# Altium PCB AT long bus (13.3 x 4.2 inches).PCBDOC
Units mil, origin at the board's own origin, x right, y up, seen from the top; angles counter-clockwise.
Board outline 13300 x 4200 mil, 10 copper layers (TopLayer, MidLayer1, MidLayer2, MidLayer3, MidLayer4, MidLayer5, MidLayer6, MidLayer7, MidLayer8, BottomLayer); 22 components, 51 nets, 177 pads, 0 vias.
Unrouted connection lines stored in the file: 85.
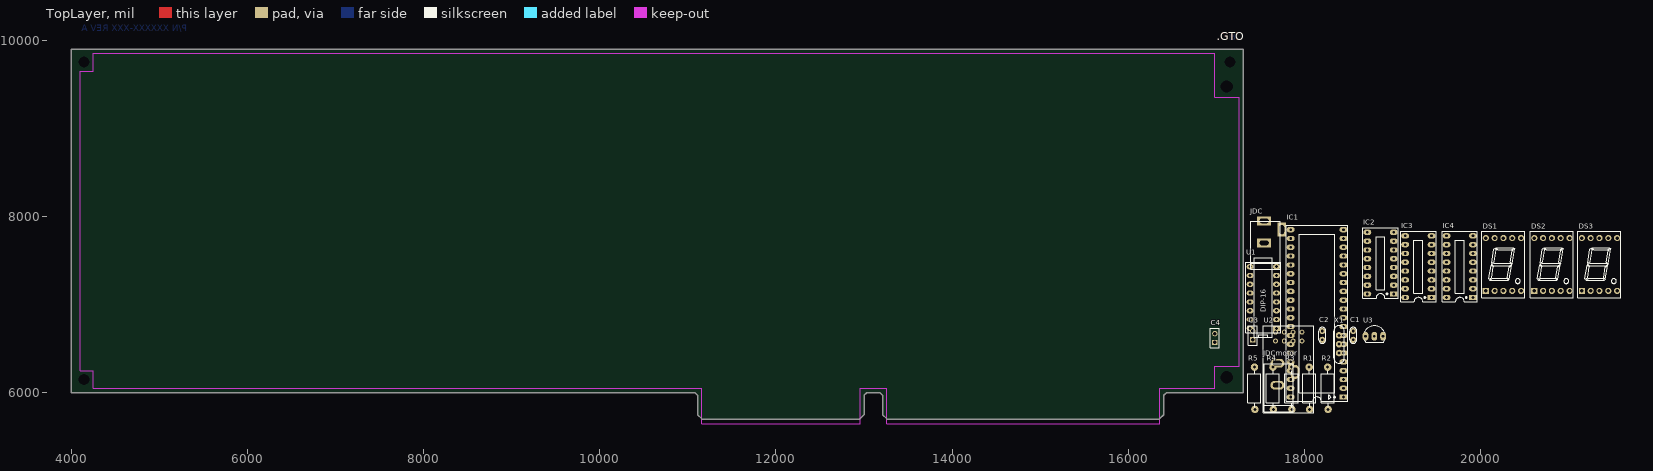
[diagram p0: TopLayer view]
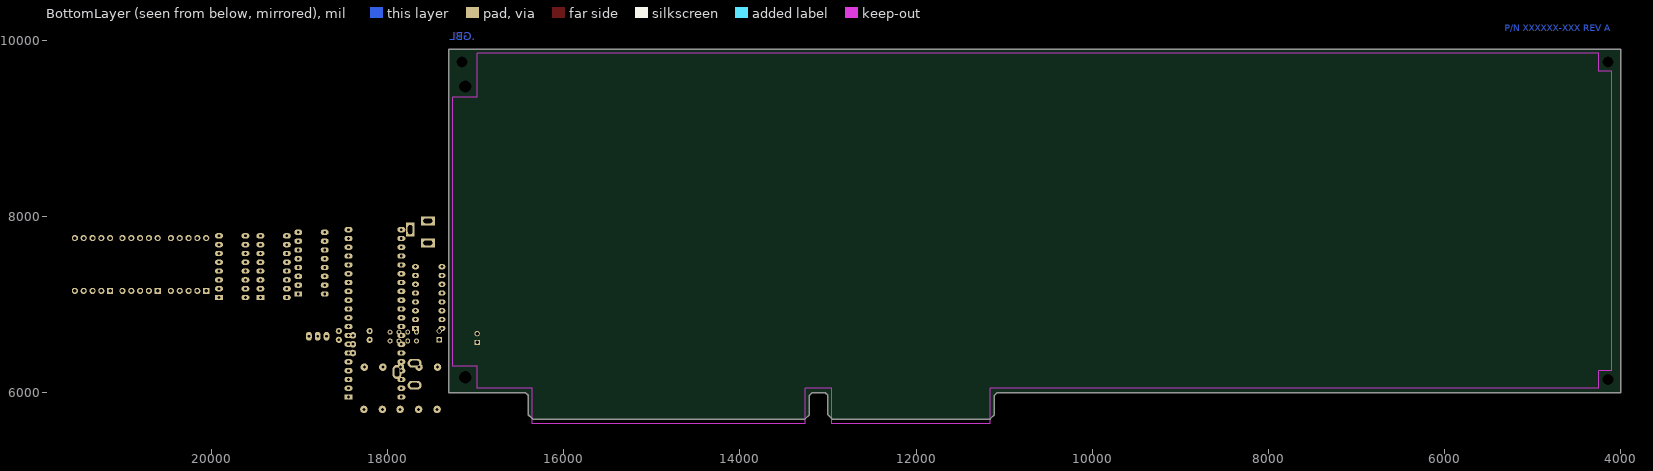
[diagram p1: BottomLayer view, seen from below]
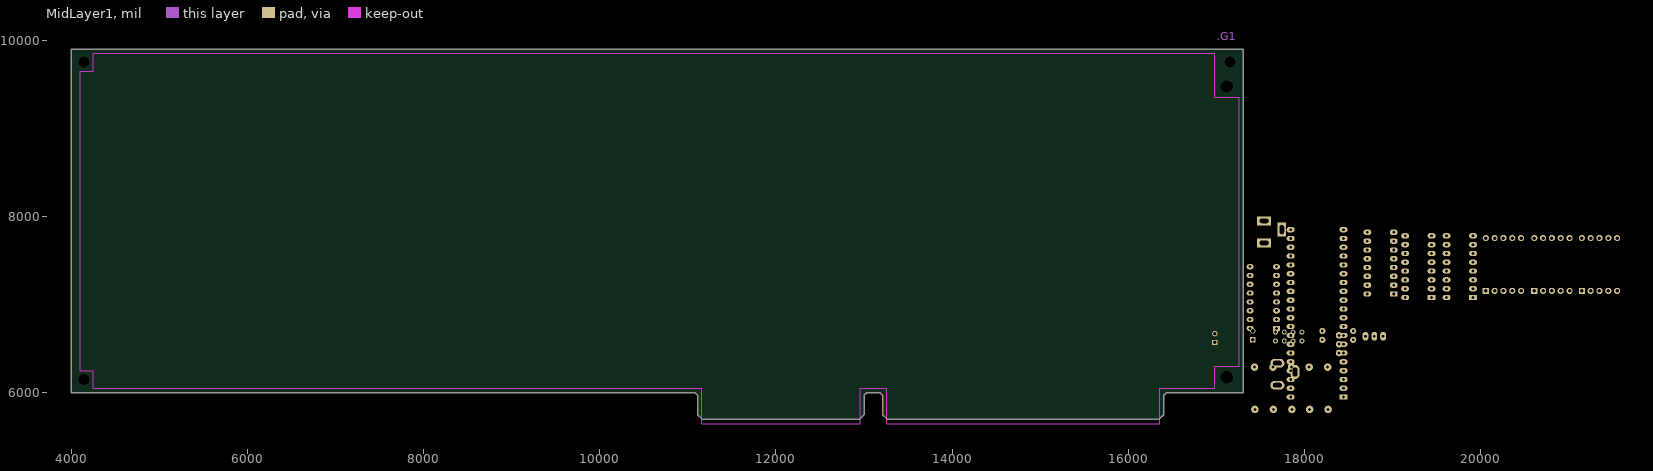
[diagram p2: MidLayer1]
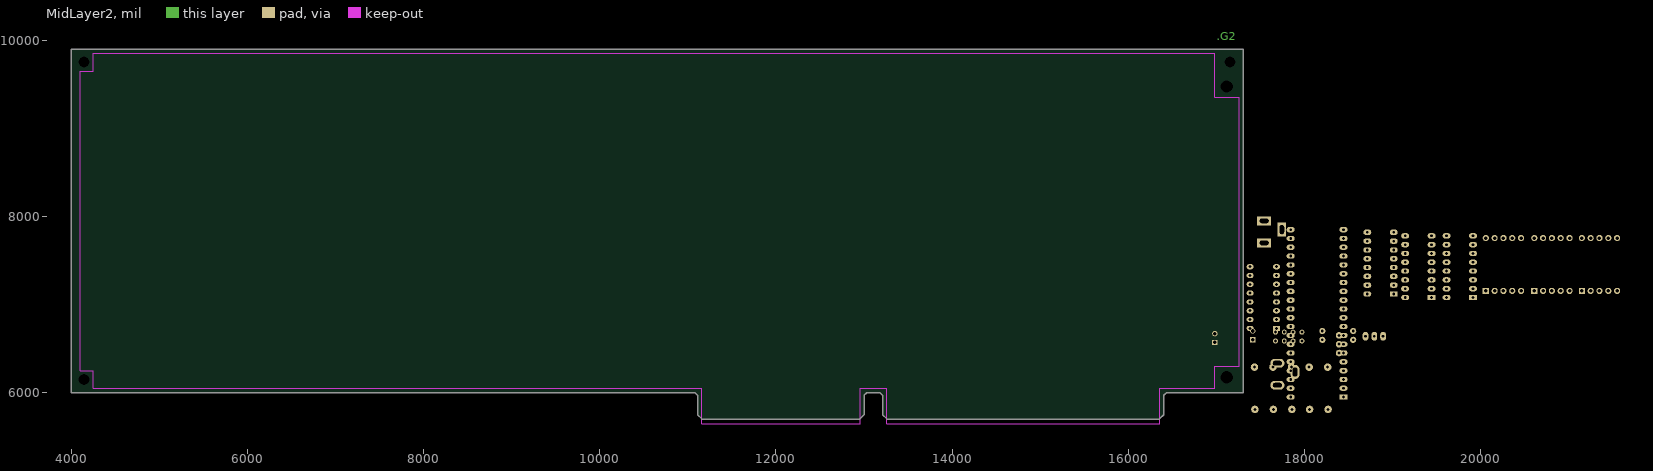
[diagram p3: MidLayer2]
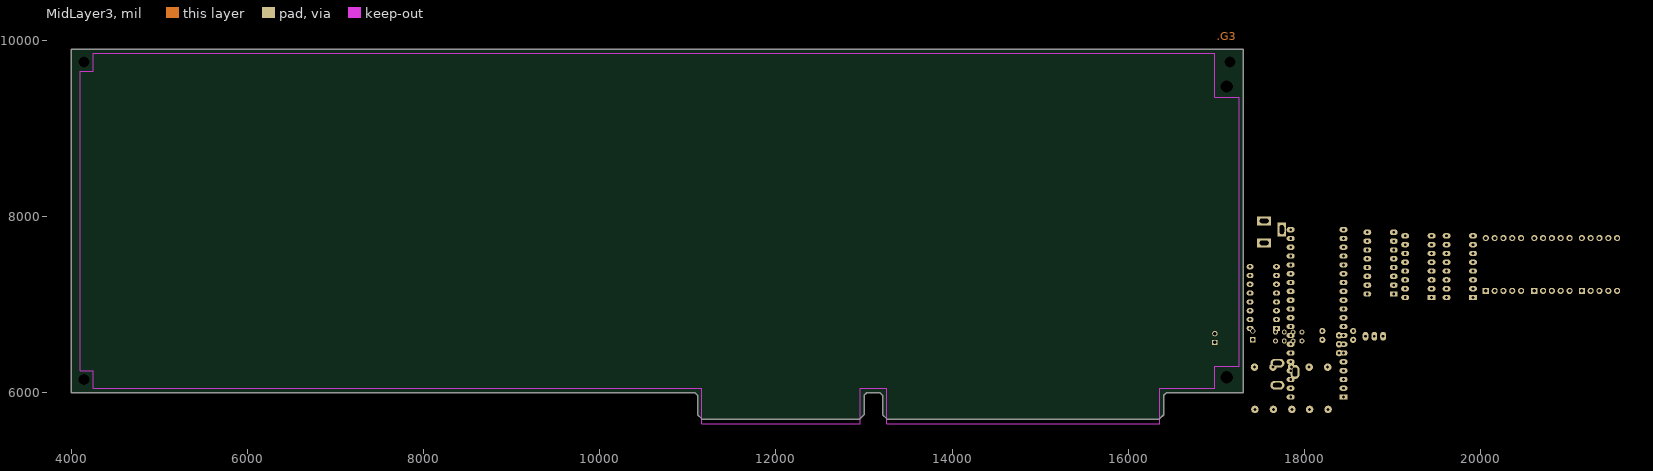
[diagram p4: MidLayer3]
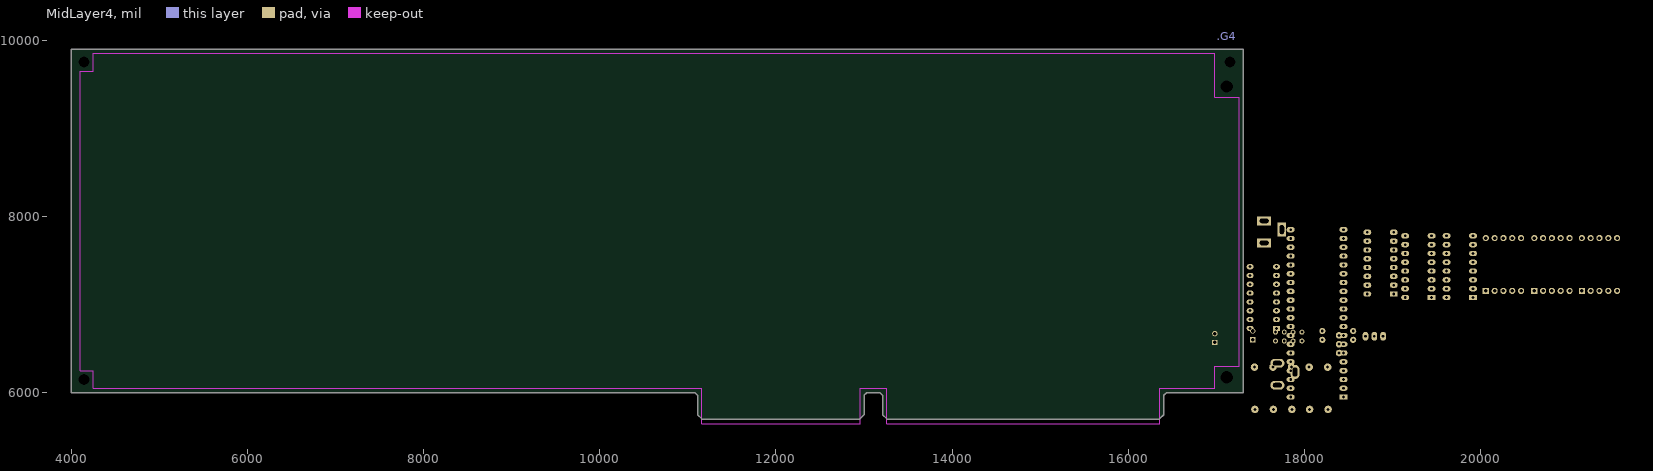
[diagram p5: MidLayer4]
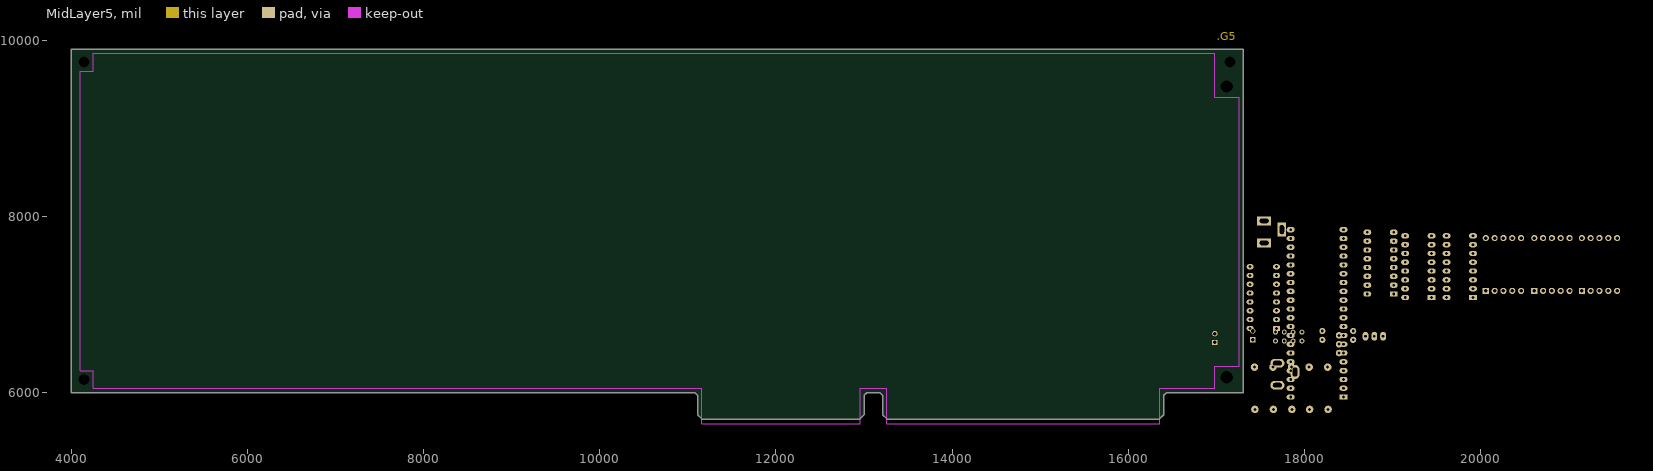
[diagram p6: MidLayer5]
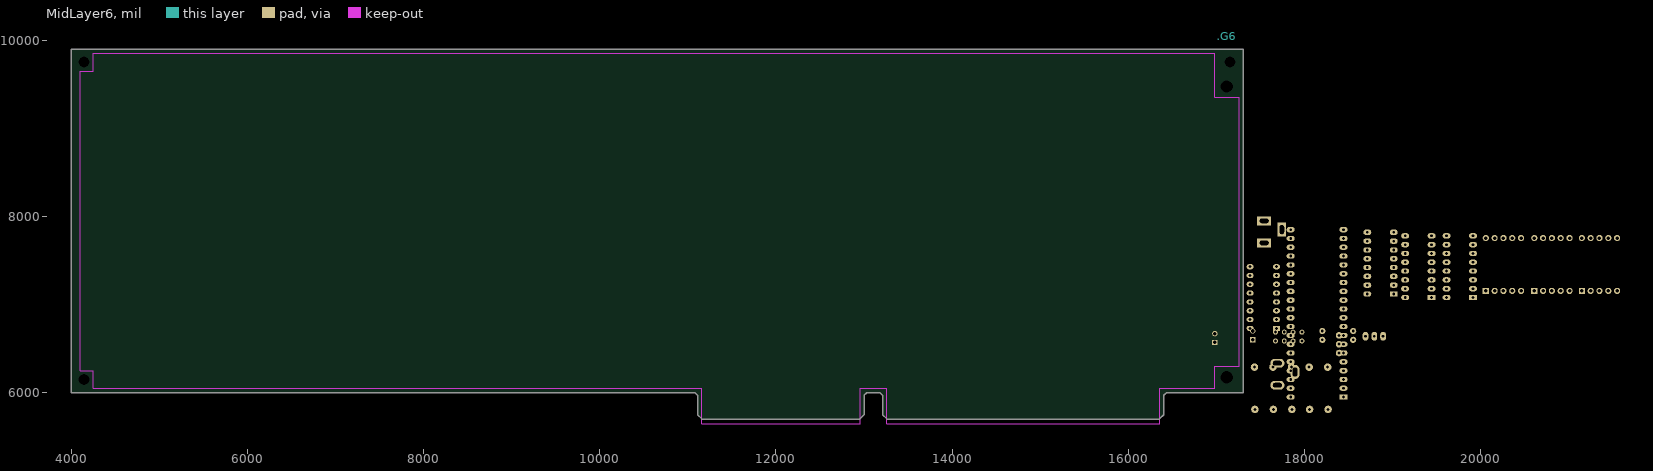
[diagram p7: MidLayer6]
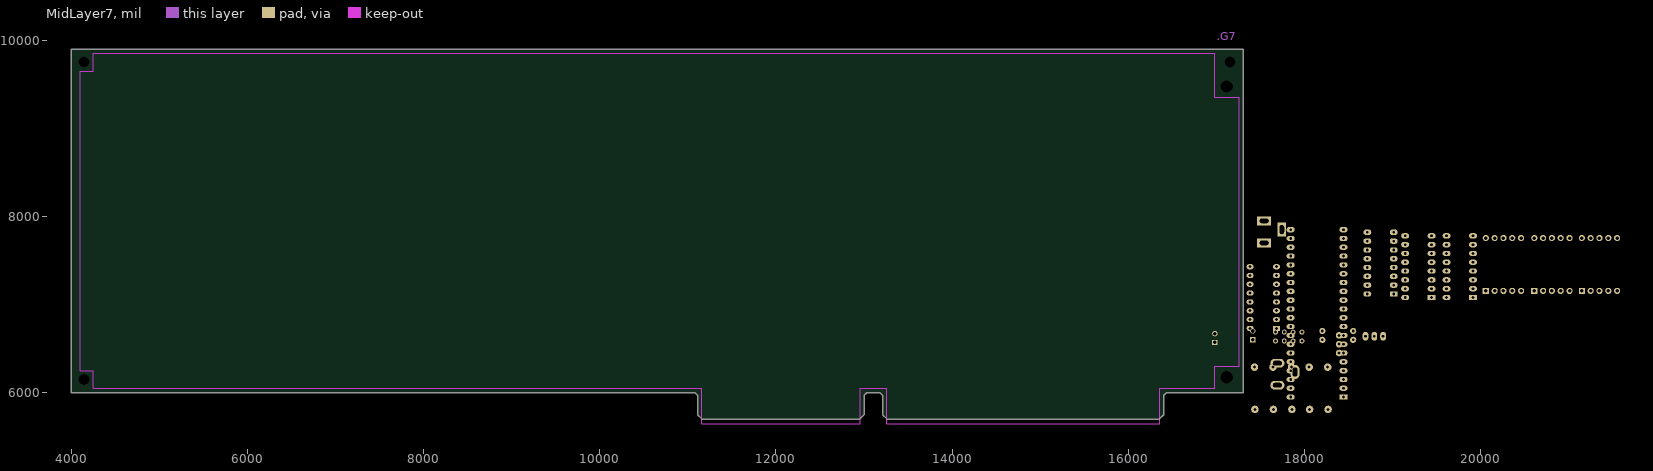
[diagram p8: MidLayer7]
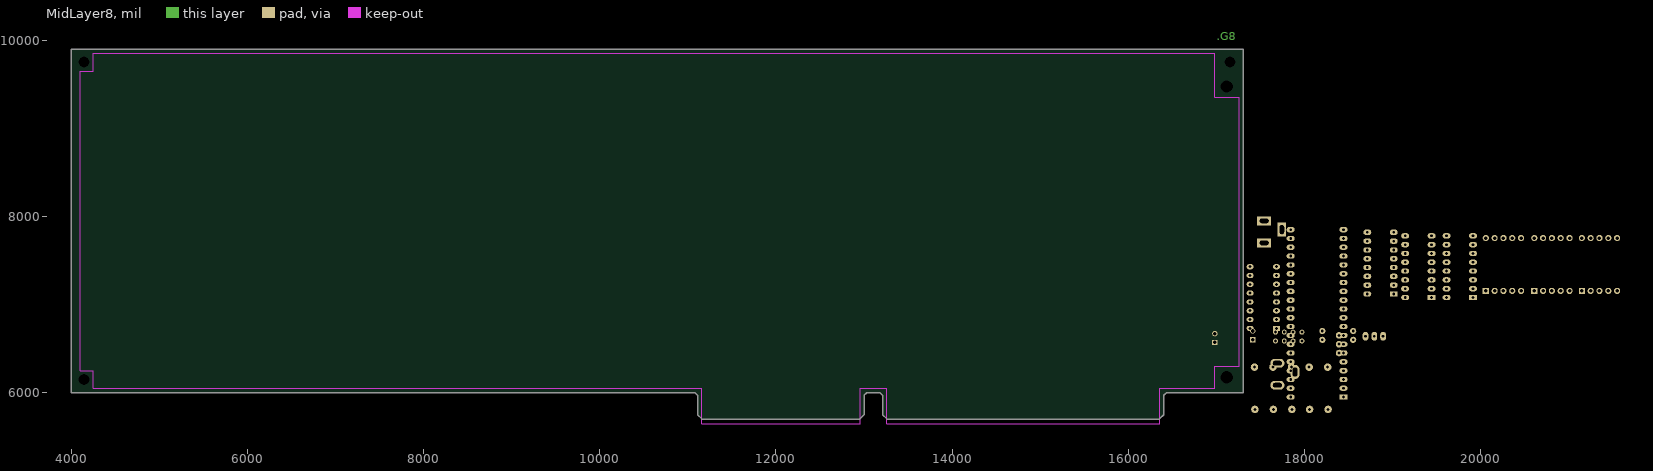
[diagram p9: MidLayer8]

## Layer stack, top to bottom
TopSolder: solder mask 0.4, Solder Resist, Dk 3.5
TopLayer: signal copper 1.4
Dielectric1: core 12.6, FR-4, Dk 4.8
MidLayer1: signal copper 1.4
Dielectric2: prepreg 12.6, FR-4, Dk 4.8
MidLayer2: signal copper 1.4
Dielectric3: core 12.6, FR-4, Dk 4.8
MidLayer3: signal copper 1.4
Dielectric4: prepreg 12.6, FR-4, Dk 4.8
MidLayer4: signal copper 1.4
Dielectric5: core 12.6, FR-4, Dk 4.8
MidLayer5: signal copper 1.4
Dielectric6: prepreg 12.6, FR-4, Dk 4.8
MidLayer6: signal copper 1.4
Dielectric7: core 12.6, FR-4, Dk 4.8
MidLayer7: signal copper 1.4
Dielectric8: prepreg 12.6, FR-4, Dk 4.8
MidLayer8: signal copper 1.4
Dielectric9: core 12.6, FR-4, Dk 4.8
BottomLayer: signal copper 1.4
BottomSolder: solder mask 0.4, Solder Resist, Dk 3.5

## Board outline
4000,6000 11080,6000 11110,5970 11110,5750 11160,5700 12950,5700 13000,5750 13000,5970 13030,6000 13180,6000 13210,5970 13210,5750 13260,5700 16350,5700 16400,5750 16400,5970 16430,6000 17300,6000 17300,9900 4000,9900

## Design rules (kind name [scope] priority, off if disabled: settings)
Clearance [All] p1: gap=10 ignorepadtopadclearanceinfootprint=FALSE except(0: Arc-Hole Track-Hole SMDPad-Hole THPad-Hole Via-Hole Fill-Hole Poly-Hole Region-Hole Text-Hole)
FabricationTestPointUsage TestPointUsage [All] p1: valid=0 allowmultiple=FALSE
FabricationTestpoint Testpoint [All] p1: side=3 testpointundercomponent=TRUE minsize=40 maxsize=100 preferedsize=60 minholesize=20 maxholesize=40 preferedholesize=32 testpointgrid=1 allowsidetop=TRUE allowsidebottom=TRUE usegrid=TRUE gridtolerance=0.01
PasteMaskExpansion PasteMaskExpansion_1 [InComponent('P1')] p1: expansion=-150
PasteMaskExpansion [All] p2: expansion=0
PlaneClearance [All] p1: clearance=10
PolygonConnect [All] p1: connectstyle=Relief reliefconductorwidth=10 reliefentries=4 polygonreliefangle="90 Angle" airgapwidth=10
RoomDefinition "AT long bus (13.3 x 4.2 inches)" [InComponentClass('AT long bus (13.3 x 4.2 inches)')] p1: confinementstyle=ConfineIn formatcopy=TRUE lockcomponents=FALSE outline 17350,5760 21600,5760 21600,7950 17350,7950
RoutingVias [All] p1: holewidth=28 width=50 viastyle="Through Hole" minholewidth=28 minwidth=50 maxholewidth=28 maxwidth=50
SilkToSolderMaskClearance SilkscreenOverComponentPads [IsPad] p1: minsilkscreentomaskgap=10 clearancetoexposedcopper=TRUE
SolderMaskExpansion [All] p1: expansion=2
Width [All] p1: maxlimit=10 minlimit=10 preferedwidth=10
25 further rules are at their usual default settings.

## Components (designator, comment, footprint, x,y, rotation, side; value= is the part's Value field where it differs from the comment)
C1 "100pF" CN1 18550,6600 r90 top
C2 "100pF" CN1 18200,6600 r90 top
C3 "JP2" JP2-C1T 17410,6600 r90 top
C4 "JP2" JP2-C1T 16980,6570 r90 top
DS1 "7SEG" LED7SEG-1-0.56 20250,7430 r0 top
DS2 "7SEG" LED7SEG-1-0.56 20800,7430 r0 top
DS3 "7SEG" LED7SEG-1-0.56 21340,7430 r0 top
IC1 "16F877A" DIP40/W0.6 18440,5950 r90 top value=PIC16F877A
IC2 "7447" DIP16/W0.3 19010,7120 r90 top value="7447 , 74247"
IC3 "7447" DIP16/W0.3 19440,7080 r90 top value="7447 , 74247"
IC4 "7447" DIP16/W0.3 19910,7080 r90 top value="7447 , 74247"
JDC "Jac DC" DC-IN 17640,7825 r90 top
JDCmotor "Jac DC" DC0 17790,6210 r90 top
R1 "Res" RES-1/2W 18050,6030 r90 top
R2 "Res" RES-1/2W 18260,6030 r90 top
R3 "Res" RES-1/2W 17850,6030 r90 top
R4 "Res" RES-1/2W 17640,6030 r90 top
R5 "Res" RES-1/2W 17430,6030 r90 top
U1 "L293D" DIP16 17529.92,7080.29 r90 top
U2 "ESP-01" ESP8266 17820,6630 r0 top
U3 "LM35" TO92-123 18790,6640 r0 top
X1 "xxMhz" XT3 18390,6550 r90 top value=4Mhz

## Footprints (in the part's own frame and the unit in brackets; to place one, negate y for a bottom-side part, rotate by r counter-clockwise, add the part's x,y. Pads: shape width x height; smd on the part's side, far side on the other; paste and mask are expansions set on the pad)
CN1 [mil]
  round 70 hole 31: 1(0,0) 2(100,0)
  silkscreen extent -40,-40 141,40, body extent -60,-30 170,37, height 265
DC0 [mil] "Jac DC input"
  oval 100x160 hole 50 slot 100 at 90 deg: 1(125,100) 2(-125,100)
  oval 160x100 hole 50 slot 100 at 0 deg: 3(25,-100)
  silkscreen extent -425,-80 120,250, body extent -410,-105 134,269, height 434
DC-IN [mil] "Jac DC input"
  rect 100x160 hole 50 slot 100 at 90 deg: 1(125,100) 2(-125,100)
  rect 160x100 hole 50 slot 100 at 0 deg: 3(25,-100)
  silkscreen extent -425,-80 120,250, body extent -410,-105 134,269, height 434
DIP16 [mm]
  rect 1.5x2 hole 0.864: 1(-8.897,-3.812)
  oval 1.5x2 hole 0.864: 2(-6.357,-3.812) 3(-3.817,-3.812) 4(-1.277,-3.812) 5(1.263,-3.812) 6(3.803,-3.812) 7(6.343,-3.812) 8(8.883,-3.812) 9(8.883,3.808) 10(6.343,3.808) 11(3.803,3.808) 12(1.263,3.808) 13(-1.277,3.808) 14(-3.817,3.808) 15(-6.357,3.808) 16(-8.897,3.808)
  silkscreen extent -11.44,-5.08 11.42,5.08, body extent -10,-3.93 10,3.94, height 1.99
DIP16/W0.3 [mil] "16 PIN, W 300mil, Pin to pin 100mil"
  rect 60x90 hole 31: 1(0,0)
  oval 60x90 hole 31: 2(100,0) 3(200,0) 4(300,0) 5(400,0) 6(500,0) 7(600,0) 8(700,0) 9(700,300) 10(600,300) 11(500,300) 12(400,300) 13(300,300) 14(200,300) 15(100,300) 16(0,300)
  silkscreen extent -50,-50 750,350, body extent -52,-57 752,356, height 299
DIP40/W0.6 [mil] "40 PIN, W 600mil, Pin to pin 100mil"
  rect 60x90 hole 31: 1(0,0)
  oval 60x90 hole 31: 2(100,0) 3(200,0) 4(300,0) 5(400,0) 6(500,0) 7(600,0) 8(700,0) 9(800,0) 10(900,0) 11(1000,0) 12(1100,0) 13(1200,0) 14(1300,0) 15(1400,0) 16(1500,0) 17(1600,0) 18(1700,0) 19(1800,0) 20(1900,0) 21(1900,600) 22(1800,600) 23(1700,600) 24(1600,600) 25(1500,600) 26(1400,600) 27(1300,600) 28(1200,600) 29(1100,600) 30(1000,600) 31(900,600) 32(800,600) 33(700,600) 34(600,600) 35(500,600) 36(400,600) 37(300,600) 38(200,600) 39(100,600) 40(0,600)
  silkscreen extent -50,-50 1950,650, body extent -82,-10 1982,600, height 224
ESP8266 [mil]
  round 56 hole 32: 1(148,57) 2(48,57) 3(-52,57) 4(-152,57) 5(-152,-43) 6(-52,-43) 7(48,-43) 8(148,-43)
  silkscreen extent -290,-860 285,132, body extent -290,-858 281,118, height 566
JP2-C1T [mm] "2 row, straight, gold plating"
  rect 1.52x1.52 hole 1.02: 1(0,0)
  round 1.52 hole 1.02: 2(2.54,0)
  silkscreen extent -1.52,-1.27 4.06,1.27, body extent -1.52,-1.25 4.06,1.25, height 8.51
LED7SEG-1-0.56 [mil]
  rect 70x70 hole 40: 1(-195,-275)
  round 70 hole 40: 2(-95,-275) 3(5,-275) 4(105,-275) 5(205,-275) 6(205,325) 7(105,325) 8(5,325) 9(-95,325) 10(-195,325)
  silkscreen extent -239,-350 249,400, body extent -241,-349 251,399, height 315
RES-1/2W [mil]
  round 85 hole 35: 1(-220,-5) 2(260,0)
  silkscreen extent -195,-74 221,75, body extent -230,-60 270,56, height 121
TO92-123 [mil] "TO-92"
  oval 66x100 hole 32: 1(-100,0) 2(0,0) 3(100,0)
  silkscreen extent -117,-65 120,118, body extent -109,-66 109,95, height 245
XT3 [mil]
  round 75 hole 34: 1(-100,0) 2(100,0) 3(0,0)
  silkscreen extent -216,-60 211,60, body extent -212,-60 208,60, height 127

## Part data
C1 C2: library part CN1, "Cap np  1pF - 472pF"
C3 C4: "WR-PHD 2.54 mm Angled Socket Header", Manufacturer="Würth Elektronik eiSos GmbH", partNo=613002143121, ComponentLink1 Description=Manufacturer, ComponentLink1URL=http://www.we-online.com, ComponentLink2 Description=Datasheet, ComponentLink2URL=http://katalog.we-online.de/em/datasheet/6130xx143121.pdf, Created by="Karrer Zheng", Created Date="29 March 2013", NoPins=02
DS1 DS2 DS3: library part LED7SEG-1, "14.2 mm General Purpose Blue 7-Segment Display: CC, RH DP, Gray Surface", Colour=Blue, PackageDocument=24-Sep-2002, ComponentLink1Description="Manufacturer Link", ComponentLink1URL=http://www.agilent.com/, DatasheetDocument=24-Sep-2002, LatestRevisionDate=17-Dec-2003, LatestRevisionNote="Schematic revised, PCB Footprint replaced.", MinimumIntensity="2020 ucd", Note="IF = 10 mA", PackageReference=H, Published=8-Jun-2000, Publisher="Altium Limited"
IC1: library part 16F877, "8K FLASH, 368B RAM, 256B EFROM", Copyright by=VanDungEvn
IC2 IC3 IC4: "BCD to 7-Segment Decoder/Driver"
JDC JDCmotor: library part DCIN, "Jac DC input"
R1 R2 R3 R4 R5: Manufacturer="Generic Components", Class=Passive, Published=08/06/2000, Publisher="Altium Hobart Technology Centre", SubClass=R
U1: "Push-Pull Four Channel Driver With Diode", ComponentLink1Description="Manufacturer Link", ComponentLink1URL=http://www.st.com/, ComponentLink2Description=Datasheet, ComponentLink2URL=http://www.st.com/stonline/products/literature/ds/1330/l293d.pdf, DatasheetVersion=Jun-1996, LatestRevisionDate=06-Jun-2005, LatestRevisionNote="Stylized 3D Model Added.", PackageDescription="DIP; 16 Leads; Row Spacing 7.62 mm; Pitch 2.54 mm", PackageReference=DIP16, PackageVersion=Apr-1996, Published=8-Jun-2000, Publisher="Altium Limited"
U2: library part ESP8266-01, "ESP-12 Wi-Fi Module"
U3: "Teminal"
X1: library part XT3, "Crystal For all Crystal 2pin."

## Free pads (board coordinates)
  round 50 hole 140: 1(17115,6175) 2(17115,9475)
  round 50 hole 125: 3(17150,9750) 4(4150,9750) 5(4150,6150)

## Nets (pads, with @x,y where several pads share a name; then routed paths per layer and width w, separated by ;. In a path a pad name is that pad's centre, name@x,y a point inside that pad or via, vN(x,y) a via of type N, cw(c..) or ccw(c..) an arc to the next point about the centre after c; other vN are vias at no path point)
ChucA: IC1.37 IC2.7
ChucB: IC1.38 IC2.1
ChucC: IC1.39 IC2.2
ChucD: IC1.40 IC2.6
DongcoA: IC1.27 IC4.7
DongcoB: IC1.28 IC4.1
DongcoC: IC1.29 IC4.2
DongcoD: IC1.30 IC4.6
DonviA: IC1.33 IC3.7
DonviB: IC1.34 IC3.1
DonviC: IC1.35 IC3.2
DonviD: IC1.36 IC3.6
GND: C1.1 C2.1 IC1.31 IC2.3 IC2.4 IC2.5 IC2.8 IC3.3 IC3.4 IC3.5 IC3.8 IC4.3 IC4.4 IC4.5 IC4.8 JDC.3 U1.4 U1.5 U3.3
MotorDC: JDCmotor.1 U1.16
MotorGND: C4.2 JDCmotor.3
MotorPIN: C4.1 U1.3
NetC1_2: C1.2 IC1.13 X1.2
NetC2_2: C2.2 IC1.14 X1.1
NetC3_1: C3.1 R4.1 R5.1 U2.4
NetC3_2: C3.2 U2.8
NetDS1_1: DS1.1 IC2.9
NetDS1_2: DS1.2 IC2.10
NetDS1_3: DS1.3 DS1.8 R3.1
NetDS1_4: DS1.4 IC2.11
NetDS1_6: DS1.6 IC2.12
NetDS1_7: DS1.7 IC2.13
NetDS1_9: DS1.9 IC2.15
NetDS1_10: DS1.10 IC2.14
NetDS2_1: DS2.1 IC3.9
NetDS2_2: DS2.2 IC3.10
NetDS2_3: DS2.3 DS2.8 R1.1
NetDS2_4: DS2.4 IC3.11
NetDS2_6: DS2.6 IC3.12
NetDS2_7: DS2.7 IC3.13
NetDS2_9: DS2.9 IC3.15
NetDS2_10: DS2.10 IC3.14
NetDS3_1: DS3.1 IC4.9
NetDS3_2: DS3.2 IC4.10
NetDS3_3: DS3.3 DS3.8 R2.1
NetDS3_4: DS3.4 IC4.11
NetDS3_6: DS3.6 IC4.12
NetDS3_7: DS3.7 IC4.13
NetDS3_9: DS3.9 IC4.15
NetDS3_10: DS3.10 IC4.14
NetIC1_2: IC1.2 U3.2
NetR4_2: R4.2 U2.3
NetR5_2: R5.2 U2.2
PicRX: IC1.26 U2.1
PicTX: IC1.25 U2.5
PWM: IC1.17 U1.1
VCC: IC1.32 IC2.16 IC3.16 IC4.16 JDC.1 R1.2 R2.2 R3.2 U1.2 U1.7 U1.8 U3.1
pads on no net: DS1.5 DS2.5 DS3.5 IC1.1 IC1.3 IC1.4 IC1.5 IC1.6 IC1.7 IC1.8 IC1.9 IC1.10 IC1.11 IC1.12 IC1.15 IC1.16 IC1.18 IC1.19 IC1.20 IC1.21 IC1.22 IC1.23 IC1.24 JDC.2 JDCmotor.2 U1.6 U1.9 U1.10 U1.11 U1.12 U1.13 U1.14 U1.15 U2.6 U2.7 X1.3

## Keep-outs
KeepOutLayer:
  lines w8: 4105,6250 4105,9650 4255,9650 4255,9850 16980,9850 16980,9350 17255,9350 17255,6300 16980,6300 16980,6050 16355,6050 16355,5650 13255,5650 13255,6050 12955,6050 12955,5650 11155,5650 11155,6050 4255,6050 4255,6250 4105,6250

## Other copper
TopLayer:
  text ".GTL" at 17000,10000 h90
MidLayer1:
  text ".G1" at 17000,10000 h90
MidLayer2:
  text ".G2" at 17000,10000 h90
MidLayer3:
  text ".G3" at 17000,10000 h90
MidLayer4:
  text ".G4" at 17000,10000 h90
MidLayer5:
  text ".G5" at 17000,10000 h90
MidLayer6:
  text ".G6" at 17000,10000 h90
MidLayer7:
  text ".G7" at 17000,10000 h90
MidLayer8:
  text ".G8" at 17000,10000 h90
BottomLayer:
  text "P/N XXXXXX-XXX REV A" at 5320,10100 h75
  text ".GBL" at 17000,10000 h90

## Silkscreen, mask and mechanical layers (free items; w line width, h text height)
TopOverlay:
  rectangle: 4281,10593 5031,10793
  rectangle: 4281,10303 5031,10503
  lines w10: 5392.59,10695.97 ccw(c5441,10735.5) 5392.71,10695.83
  text "C" at 5496,10698 h60
  text "2002 COMPANY NAME" at 5646,10698 h75
  text "S/N" at 4031,10650.5 h75
  text "BOARD NAME" at 5496,10523 h75
  text "ASSY NO.: XXXXXX" at 5496,10373 h75
  text "REV" at 4031,10353 h75
  text ".GTO" at 17000,10000 h90
TopPaste:
  text ".GTP" at 17000,10000 h90
BottomPaste:
  text ".GBP" at 17000,10000 h90
TopSolder:
  text ".GTS" at 17000,10000 h90
BottomSolder:
  text ".GBS" at 17000,10000 h90
Mechanical1:
  the board outline again, w20
Mechanical3:
  lines w10: 16990,6125 16990,6075 17040,6075 ; 16990,6150 16990,6200 ; 16990,6225 16990,6275 17040,6275 ; 16990,9425 16990,9375 17040,9375 ; 16990,9450 16990,9500 ; 16990,9525 16990,9575 17040,9575 ; 17065,6075 17115,6075 ; 17065,6275 17115,6275 ; 17065,9375 17115,9375 ; 17065,9575 17115,9575 ; 17140,6075 17190,6075 ; 17140,6275 17190,6275 ; 17140,9375 17190,9375 ; 17140,9575 17190,9575 ; 17215,6075 17265,6075 ; 17215,6275 17265,6275 ; 17215,9375 17265,9375 ; 17215,9575 17265,9575 ; 17300,6075 17340,6075 17340,4925 17365,4925 17365,9650 17790,9650 17790,9675 17340,9675 17340,9575 17300,9575 ; 17300,6275 17340,6275 17340,9375 17300,9375
Mechanical4:
  circle w10: c11145.67,5719.32 r100
  lines w10: 18405,7800 18480,7725 18555,7800 18630,7725 18705,7800 18780,7725 18855,7800 ; 18886.25,6718.75 19130,6475 19330,6475 ; 20030,7925 20755,7925 ; 21380,6475 21130,6475 21423.75,6768.75 ; 22330,6675 22330,7075 22530,7175 22130,7275 22330,7375 22330,7775 ; 11003.67,5666.32 11023.67,5671.32 11003.67,5721.32 11003.67,5666.32 ; 11003.87,5721.16 11025.36,5771.79 11005,5775 11003.87,5721.16 ; 18780,6825 18867.5,6700 18905,6737.5 18780,6825 ; 21405,6787.5 21442.5,6750 21530,6875 21405,6787.5
  lines w20: 18430,7775 18430,6875 18530,6775 18730,6775 18830,6875 18830,7775 ; 21430,7775 21430,6975 21630,6775 22330,6775
  text ".Pcb_File_Name_No_Path" at 15100,10190 h90
  text ".Printout_Name" at 15100,10000 h90
  text "DETAIL A" at 20030,7975 h120
  text "o" at 20055,6500 h60
  text "o" at 22105,6500 h60
  text ".020 X 45  CHAMFER" at 19405,6425 h90
  text "0.05 X 45  CHAMFER" at 21455,6425 h90
  text "BOTH SIDES" at 19405,6250 h90
  text "TYP 4 PLCS" at 21455,6250 h90
  text "ENTIRE LENGTH OF" at 19405,6075 h90
  text "EDGE CONNECTOR" at 19405,5900 h90
  text "SEE DETAIL A" at 10230,5675 h75
DrillDrawing:
  text ".LEGEND" at 18335,8655 h90
  text "Drilling Details." at 18340,8485 h90

## Dimensions
3980,6150 to 4000,6000 on Mechanical4
4150,5980 to 4000,6000 on Mechanical4
16350,5700 to 16430,6000 on Mechanical4

## Text inside footprints (layer, text, board x,y; h text height)
U1: TopOverlay "DIP-16" at 17560,6910 h59.05 r90